# EAGLE board HIP4081A v1.1 (EAGLE 5.01)
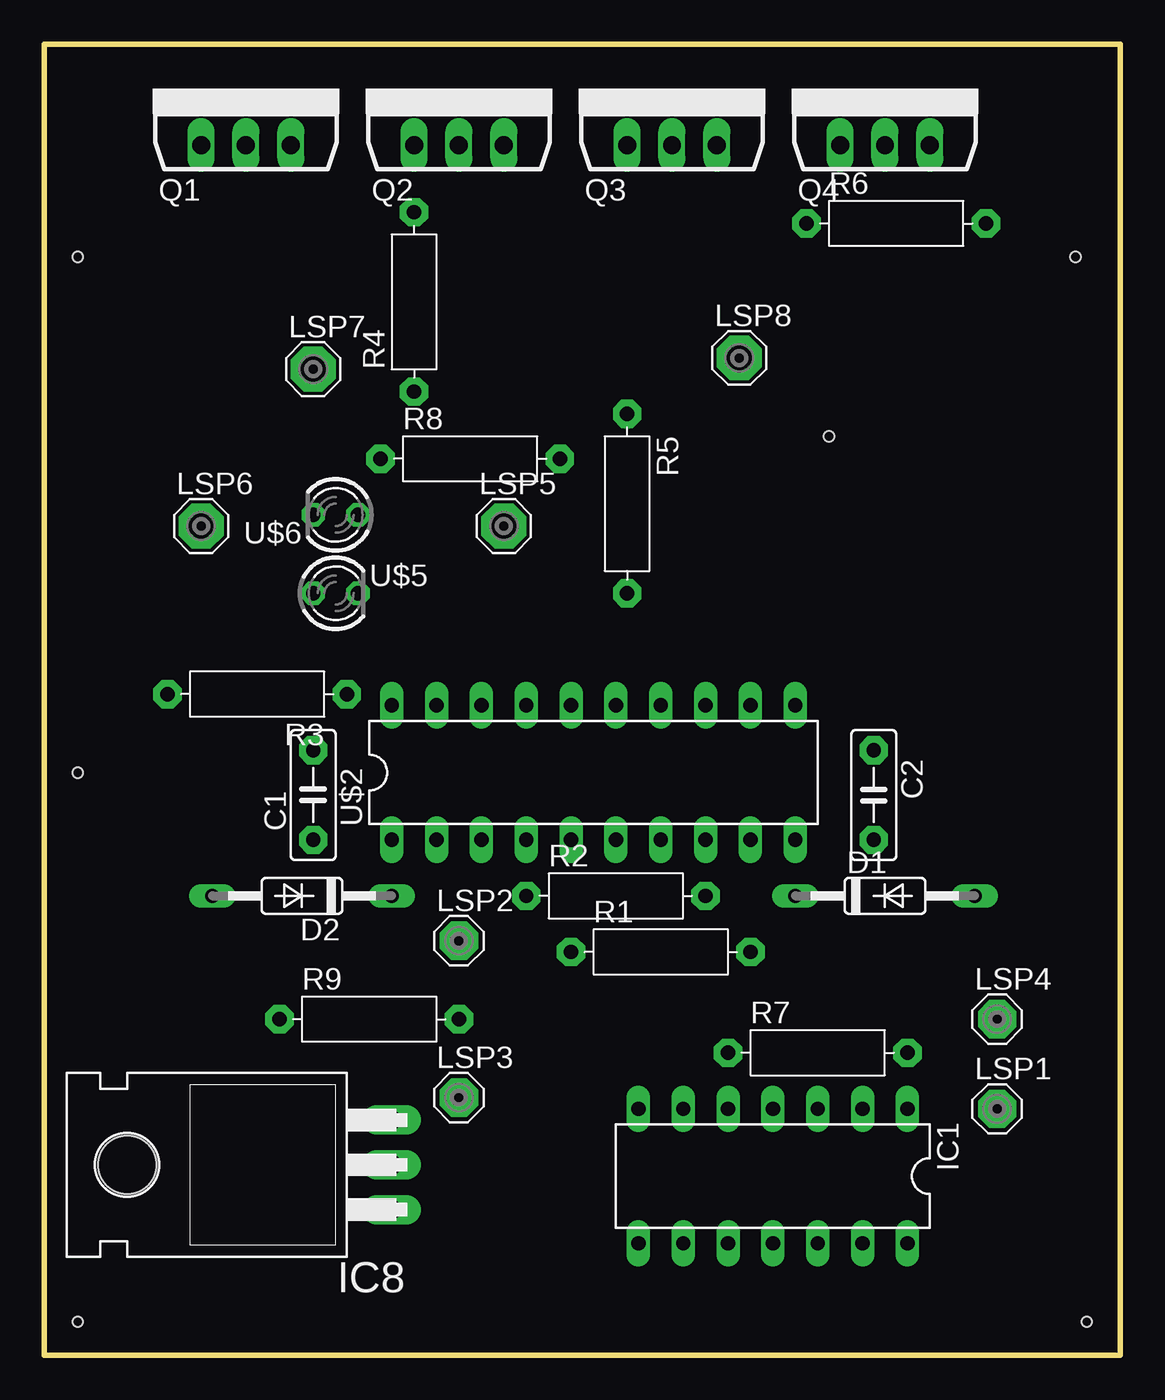
[diagram p0: board, top side]
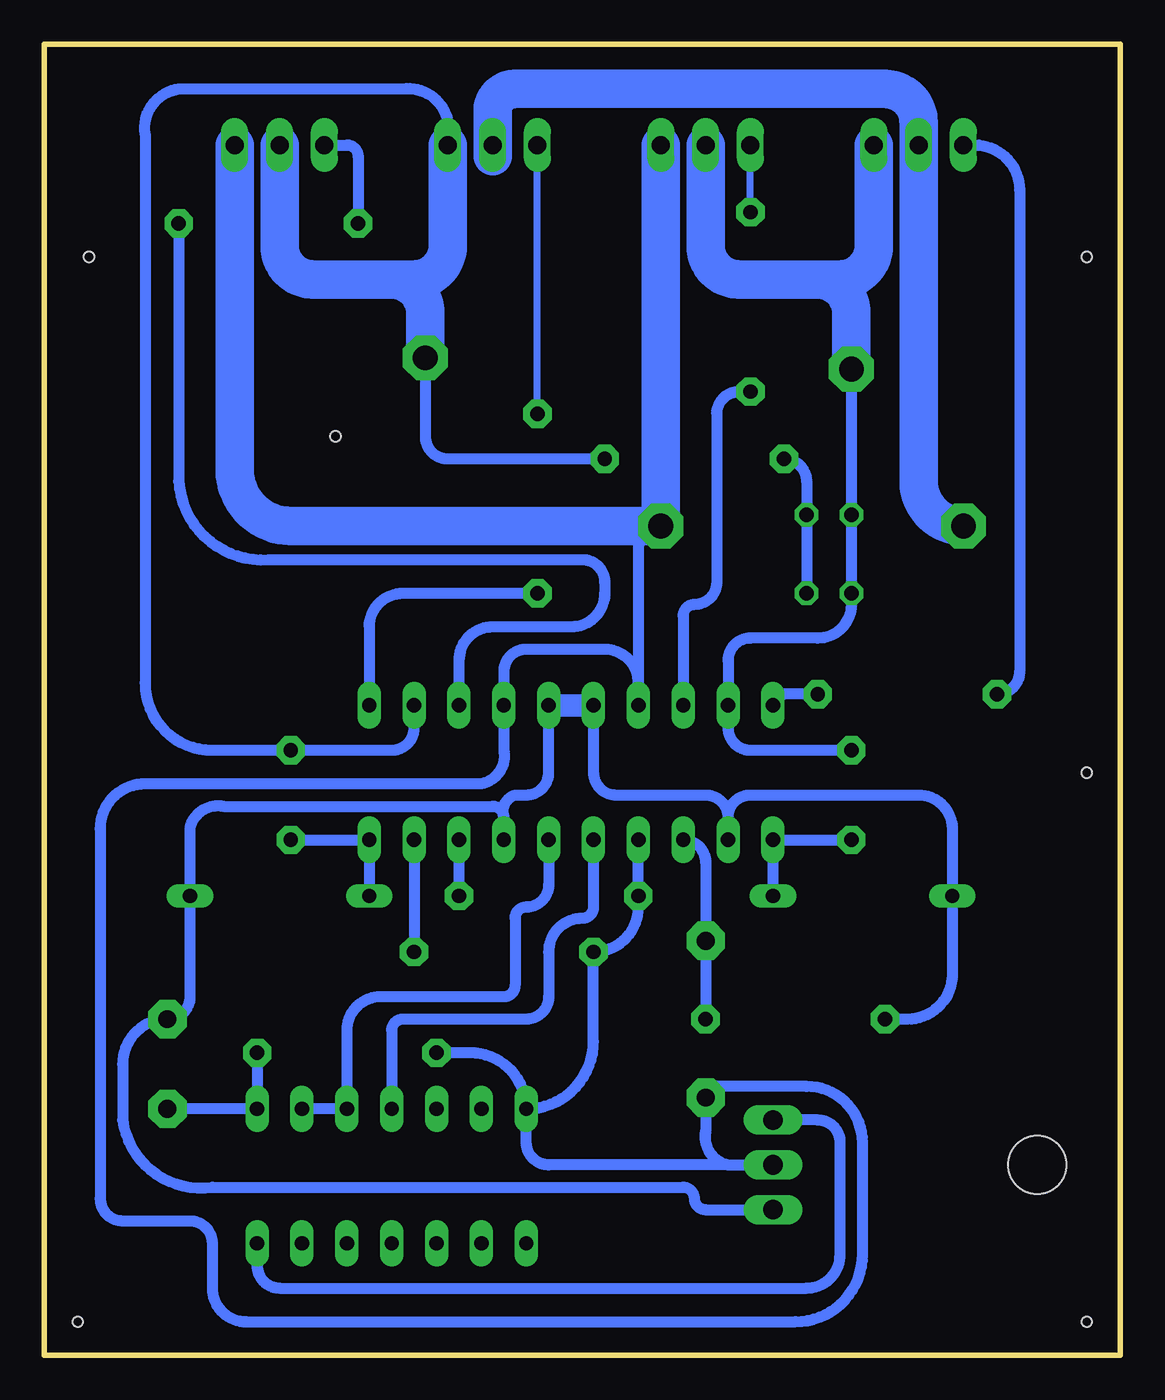
[diagram p1: board, bottom side, seen from below]

Size 60.96 x 74.29 mm. Coordinates in mm from the lower left corner, seen from the top.
Outline: 60.96,0 60.96,74.29 0,74.29 0,0 60.96,0
Copper layers 16: Bottom 0.035mm
Design rules "default": minimum track width 10mil, minimum drill 24mil, track to track 8mil, track to pad 8mil, pad to pad 8mil, via to via 8mil, smd to smd 8mil, copper to edge 40mil, drill to drill 8mil, minimum pad ring 10mil, minimum via ring 8mil, stop-mask expansion 4mil, vias tented up to drill 0mil, thermal gap 10mil
Holes 0.6 mm at 1.91,62.23 58.42,62.23 59.06,1.91 1.91,1.91 1.91,33.02 44.45,52.07

## Footprints (pad centres in the part's own frame; a part is rotated, then mirrored left to right if it is on the bottom)
C5B2.5 = drill 0.813 pad 1.6 octagon: 1 -2.54,0; 2 2.54,0
DO35-10 = drill 0.813 long: A 5.08,0; C -5.08,0
DIL14 = drill 0.813 long: 1 -7.62,-3.81; 2 -5.08,-3.81; 3 -2.54,-3.81; 4 0,-3.81; 5 2.54,-3.81; 6 5.08,-3.81; 7 7.62,-3.81; 8 7.62,3.81; 9 5.08,3.81; 10 2.54,3.81; 11 0,3.81; 12 -2.54,3.81; 13 -5.08,3.81; 14 -7.62,3.81
TO220H = drill 1.118 long: 1 -2.54,-10.16; 2 0,-10.16; 3 2.54,-10.16 | hole 3.302: 0,4.826
MCS10B = drill 1.016 pad 2.159 octagon: MP 0,0
SE14 = drill 1.397 pad 2.54 octagon: MP 0,0
TO262-V = drill 1.016 long: 1 -2.54,0; 2 0,0; 3 2.54,0
R-10 = drill 0.813 pad 1.6 octagon: 1 -5.08,0; 2 5.08,0
DIL20 = drill 0.813 long: 1 -11.43,-3.81; 2 -8.89,-3.81; 3 -6.35,-3.81; 4 -3.81,-3.81; 5 -1.27,-3.81; 6 1.27,-3.81; 7 3.81,-3.81; 8 6.35,-3.81; 9 8.89,-3.81; 10 11.43,-3.81; 11 11.43,3.81; 12 8.89,3.81; 13 6.35,3.81; 14 3.81,3.81; 15 1.27,3.81; 16 -1.27,3.81; 17 -3.81,3.81; 18 -6.35,3.81; 19 -8.89,3.81; 20 -11.43,3.81
LED3MM = drill 0.813 octagon: A -1.27,0; K 1.27,0

## Placement (x,y rotation side)
C1  220n  [C5B2.5]  15.24,31.75 90 top
C2  220n  [C5B2.5]  46.99,31.75 270 top
D1  1N4148  [DO35-10]  47.63,26.03 0 top
D2  1N4148  [DO35-10]  14.61,26.03 180 top
IC1  7404N  [DIL14]  41.28,10.16 180 top
IC8  7805T  [TO220H]  9.53,10.79 90 top
LSP1  MCS10B  [MCS10B]  53.98,13.97 0 top
LSP2  MCS10B  [MCS10B]  23.5,23.5 0 top
LSP3  MCS10B  [MCS10B]  23.5,14.6 0 top
LSP4  MCS10B  [MCS10B]  53.98,19.05 0 top
LSP5  SE14  [SE14]  26.04,46.99 0 top
LSP6  SE14  [SE14]  8.89,46.99 0 top
LSP7  SE14  [SE14]  15.24,55.88 0 top
LSP8  SE14  [SE14]  39.37,56.51 0 top
Q1  IRF3704L-V  [TO262-V]  11.43,68.58 0 top
Q2  IRF3704L-V  [TO262-V]  23.5,68.58 0 top
Q3  IRF3704L-V  [TO262-V]  35.56,68.58 0 top
Q4  IRF3704L-V  [TO262-V]  47.63,68.58 0 top
R1  500  [R-10]  34.93,22.86 0 top
R2  500  [R-10]  32.39,26.03 0 top
R3  10  [R-10]  12.07,37.47 180 top
R4  10  [R-10]  20.96,59.69 90 top
R5  10  [R-10]  33.02,48.26 270 top
R6  10  [R-10]  48.26,64.13 0 top
R7  500  [R-10]  43.82,17.14 0 top
R8  480  [R-10]  24.13,50.8 0 top
R9  500  [R-10]  18.42,19.05 0 top
U$2  HIP4081A  [DIL20]  31.12,33.02 0 top
U$5  led  [LED3MM]  16.51,43.18 0 top
U$6  led  [LED3MM]  16.51,47.62 180 top

## Library data of the parts
C1 C2 = capacitor-wima
D1 D2 = diode
IC1 = 74xx-us
IC8 = linear
LSP1-LSP8 = solpad
Q1-Q4 = transistor-power
R1-R9 = discrete
U$2 = intersil
U$5 U$6 = led

## Nets
+5V: IC1.14 IC8.3
+12V: D1.A D2.A IC8.1 LSP4.MP R9.1 U$2.2 U$2.7 U$2.15 U$2.16
+24V: LSP6.MP Q1.2 Q3.2
N$1: C1.2 LSP7.MP Q1.3 Q2.2 U$2.19 U$5.A U$6.K
N$2: C2.1 LSP8.MP Q3.3 Q4.2 R8.2 U$2.12
N$3: R3.1 U$2.20
N$4: R4.1 U$2.18
N$5: IC1.4 U$2.5
N$6: R8.1 U$5.K U$6.A
N$7: R1.2 U$2.9
N$9: R2.2 U$2.8
N$10: C1.1 D2.C U$2.1
N$11: R5.2 U$2.11
N$12: R6.2 U$2.13
N$13: C2.2 D1.C U$2.10
N$15: LSP2.MP R9.2 U$2.3
N$16: Q2.1 R4.2
N$17: Q4.1 R6.1
N$18: Q3.1 R5.1
N$19: Q1.1 R3.2
N$20: IC1.1 LSP1.MP R7.2
N$21: IC1.2 IC1.3 U$2.6
PE: IC1.7 IC8.2 LSP3.MP LSP5.MP Q2.3 Q4.3 R1.1 R2.1 R7.1 U$2.4 U$2.14 U$2.17

## Tracks (layer width: path | path; a pad name or v marks a point on that pad's centre or on a via)
+5V
  Bottom 0.61: IC1.14 48.9,5.08 arc-90 47.63,3.81 17.78,3.81 arc-90 15.88,5.72 15.88,12.06 arc-90 17.15,13.33 IC8.3
+12V
  Bottom 0.406: 22.23,30.48 U$2.2
  Bottom 0.61: U$2.16 29.84,33.02 arc-90 28.58,31.75 23.5,31.75 arc90 22.23,30.48 arc90 20.96,31.75 11.43,31.75 arc90 9.53,29.84 D2.A 9.53,21.59 arc90 12.07,19.05 R9.1 | U$2.15 32.39,33.02 arc90 33.66,31.75 34.29,31.75 arc-90 34.93,30.48 | 34.93,30.48 U$2.7 | 34.93,30.48 arc-90 35.56,31.11 50.8,31.11 arc-90 52.71,29.84 D1.A 52.71,20.32 arc90 LSP4.MP arc-90 56.52,16.51 56.52,13.33 arc-90 51.44,9.53 24.77,9.53 arc90 24.13,8.89 arc-90 23.5,8.25 IC8.1
  Bottom 1.27: U$2.15 U$2.16
+24V
  Bottom 2.184: 35.56,67.94 Q3.2 35.56,70.48 arc90 34.29,71.75 13.34,71.75 arc90 11.43,69.85 Q1.2 11.43,49.53 arc-90 LSP6.MP
N$1
  Bottom 0.61: C1.2 20.96,34.29 arc90 22.23,35.56 U$2.19 22.23,39.37 arc90 20.96,40.64 17.15,40.64 arc-90 15.24,42.54 U$5.A U$6.K LSP7.MP
  Bottom 2.184: Q1.3 13.97,62.86 arc90 15.88,60.96 17.15,60.96 | 17.15,60.96 21.59,60.96 arc90 23.5,62.86 Q2.2 | LSP7.MP 15.24,59.05 arc-90 17.15,60.96
N$2
  Bottom 0.61: U$2.12 40.01,35.56 arc90 41.28,34.29 C2.1 51.44,34.29 arc90 55.25,38.1 55.25,69.22 arc90 53.34,71.75 40.64,71.75 arc90 38.1,69.85 38.1,64.13 | 38.1,50.8 R8.2 | 39.37,52.07 arc-90 38.1,50.8 | 39.37,52.07 arc-90 38.1,50.8 | 39.37,52.07 LSP8.MP arc90 40.01,57.15 40.01,60.96 arc-90 38.1,62.86
  Bottom 2.184: Q3.3 38.1,64.13 38.1,62.86 arc90 40.01,60.96 41.28,60.96 | 41.28,60.96 45.72,60.96 arc90 47.63,62.86 Q4.2 | LSP8.MP 39.37,59.05 arc-90 41.28,60.96
N$3
  Bottom 0.61: R3.1 19.05,37.47 arc-90 U$2.20
N$4
  Bottom 0.61: R4.1 21.59,54.61 arc-90 22.86,53.34 22.86,43.81 arc90 24.13,42.54 arc-90 24.77,41.91 U$2.18
N$5
  Bottom 0.61: IC1.4 41.28,18.41 arc90 40.64,19.05 33.66,19.05 arc-90 32.39,20.32 32.39,22.86 arc90 30.48,24.76 arc-90 29.84,25.4 U$2.5
N$6
  Bottom 0.61: U$5.K U$6.A 17.78,49.53 arc-90 R8.1
N$7
  Bottom 0.61: U$2.9 R1.2
N$9
  Bottom 0.61: U$2.8 R2.2
N$10
  Bottom 0.61: D2.C U$2.1 C1.1
N$11
  Bottom 0.61: R5.2 40.64,43.18 arc-90 42.55,41.28 U$2.11
N$12
  Bottom 0.61: R6.2 53.34,49.53 arc-90 48.26,45.08 30.48,45.08 arc90 29.21,43.81 29.21,43.18 arc90 31.12,41.28 35.56,41.28 arc-90 37.47,39.37 U$2.13
N$13
  Bottom 0.61: D1.C U$2.10 C2.2
N$15
  Bottom 0.61: U$2.3 arc90 23.5,27.94 LSP2.MP R9.2
N$16
  Bottom 0.406: R4.2 Q2.1
N$17
  Bottom 0.61: Q4.1 43.82,68.58 arc90 43.18,67.94 R6.1
N$18
  Bottom 0.406: R5.1 Q3.1
N$19
  Bottom 0.61: R3.2 arc-90 5.72,38.73 5.72,66.04 arc-90 8.26,68.58 Q1.1
N$20
  Bottom 0.61: R7.2 IC1.1 LSP1.MP
N$21
  Bottom 0.61: IC1.2 IC1.3 43.82,18.41 arc90 41.91,20.32 34.93,20.32 arc-90 34.29,20.95 34.29,24.76 arc90 33.66,25.4 arc-90 32.39,26.67 U$2.6
PE
  Bottom 0.61: 22.23,10.79 32.39,10.79 arc90 33.66,12.06 IC1.7 | 22.23,10.79 IC8.2 | 22.23,10.79 arc90 23.5,12.7 LSP3.MP arc90 22.86,15.24 17.78,15.24 arc90 14.61,12.06 14.61,5.72 arc90 18.42,1.91 49.53,1.91 arc90 51.44,3.81 51.44,6.35 arc-90 52.71,7.62 56.52,7.62 arc90 57.79,8.89 57.79,29.84 arc90 55.25,32.38 36.2,32.38 arc-90 34.93,34.29 U$2.14 34.93,38.73 | U$2.4 R2.1 27.31,25.4 arc90 R1.1 29.84,17.78 arc90 IC1.7 | R7.1 36.83,17.14 arc90 IC1.7 | LSP5.MP arc-90 27.31,45.72 U$2.17 27.31,38.1 | 27.31,38.1 arc-90 29.21,40 | 33.66,40 arc-90 34.93,38.73 | 27.31,38.1 arc-90 29.21,40 | 29.21,40 33.66,40 | 33.66,40 arc-90 34.93,38.73
  Bottom 2.184: Q2.3 LSP5.MP 46.99,46.99 arc90 50.17,50.16 Q4.3